# Allegro board 8880F5-0826_newday.brd
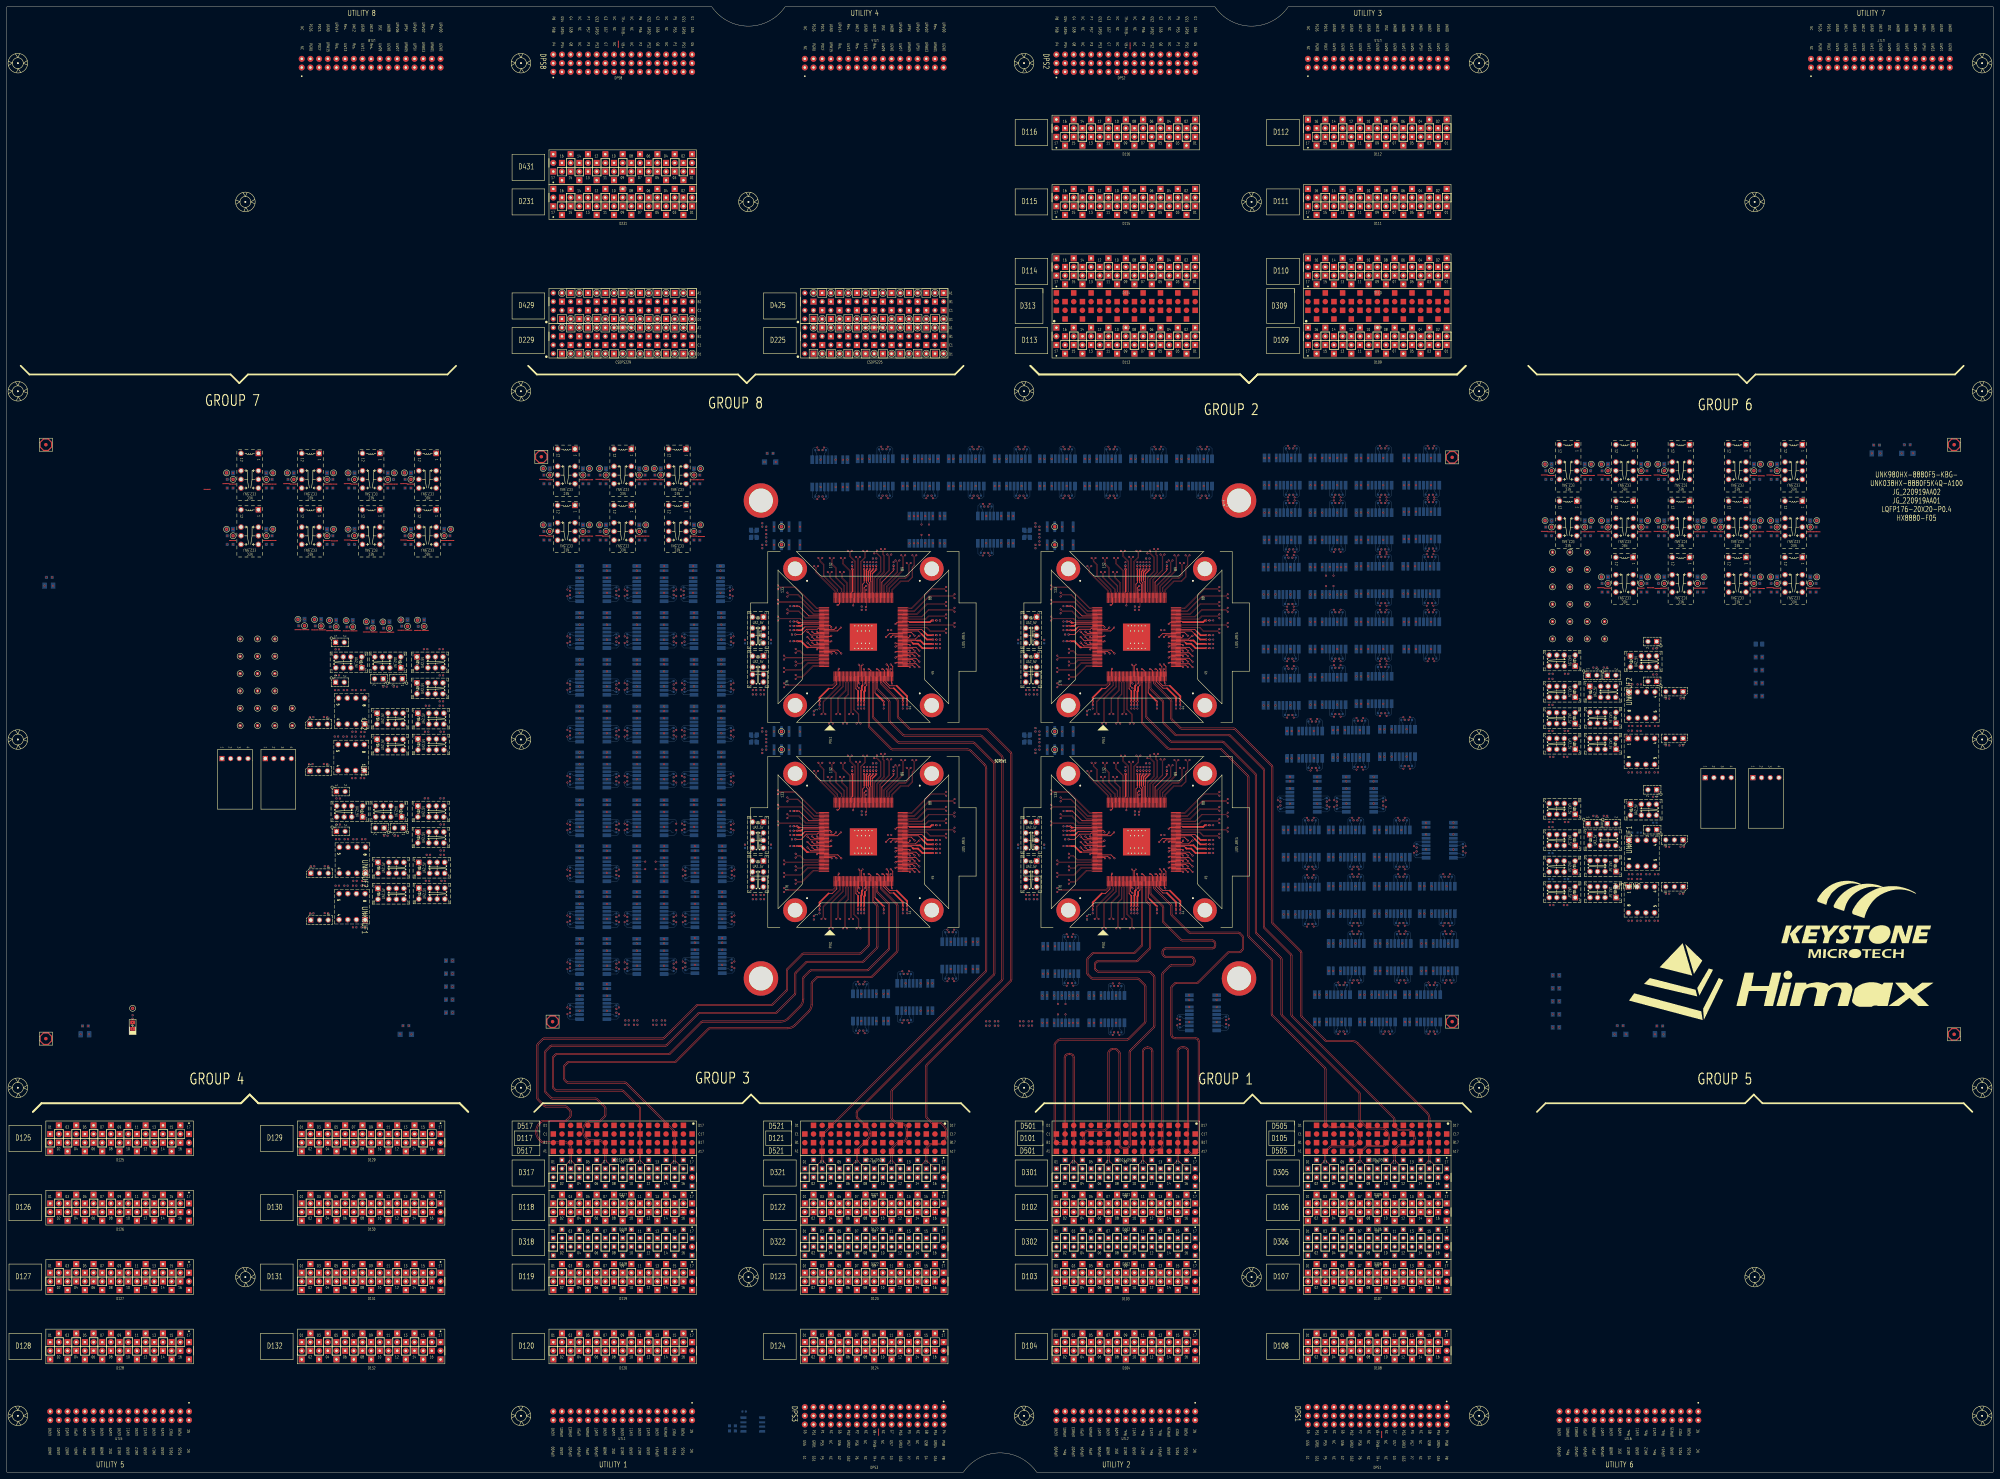
[diagram p0: board, top side]
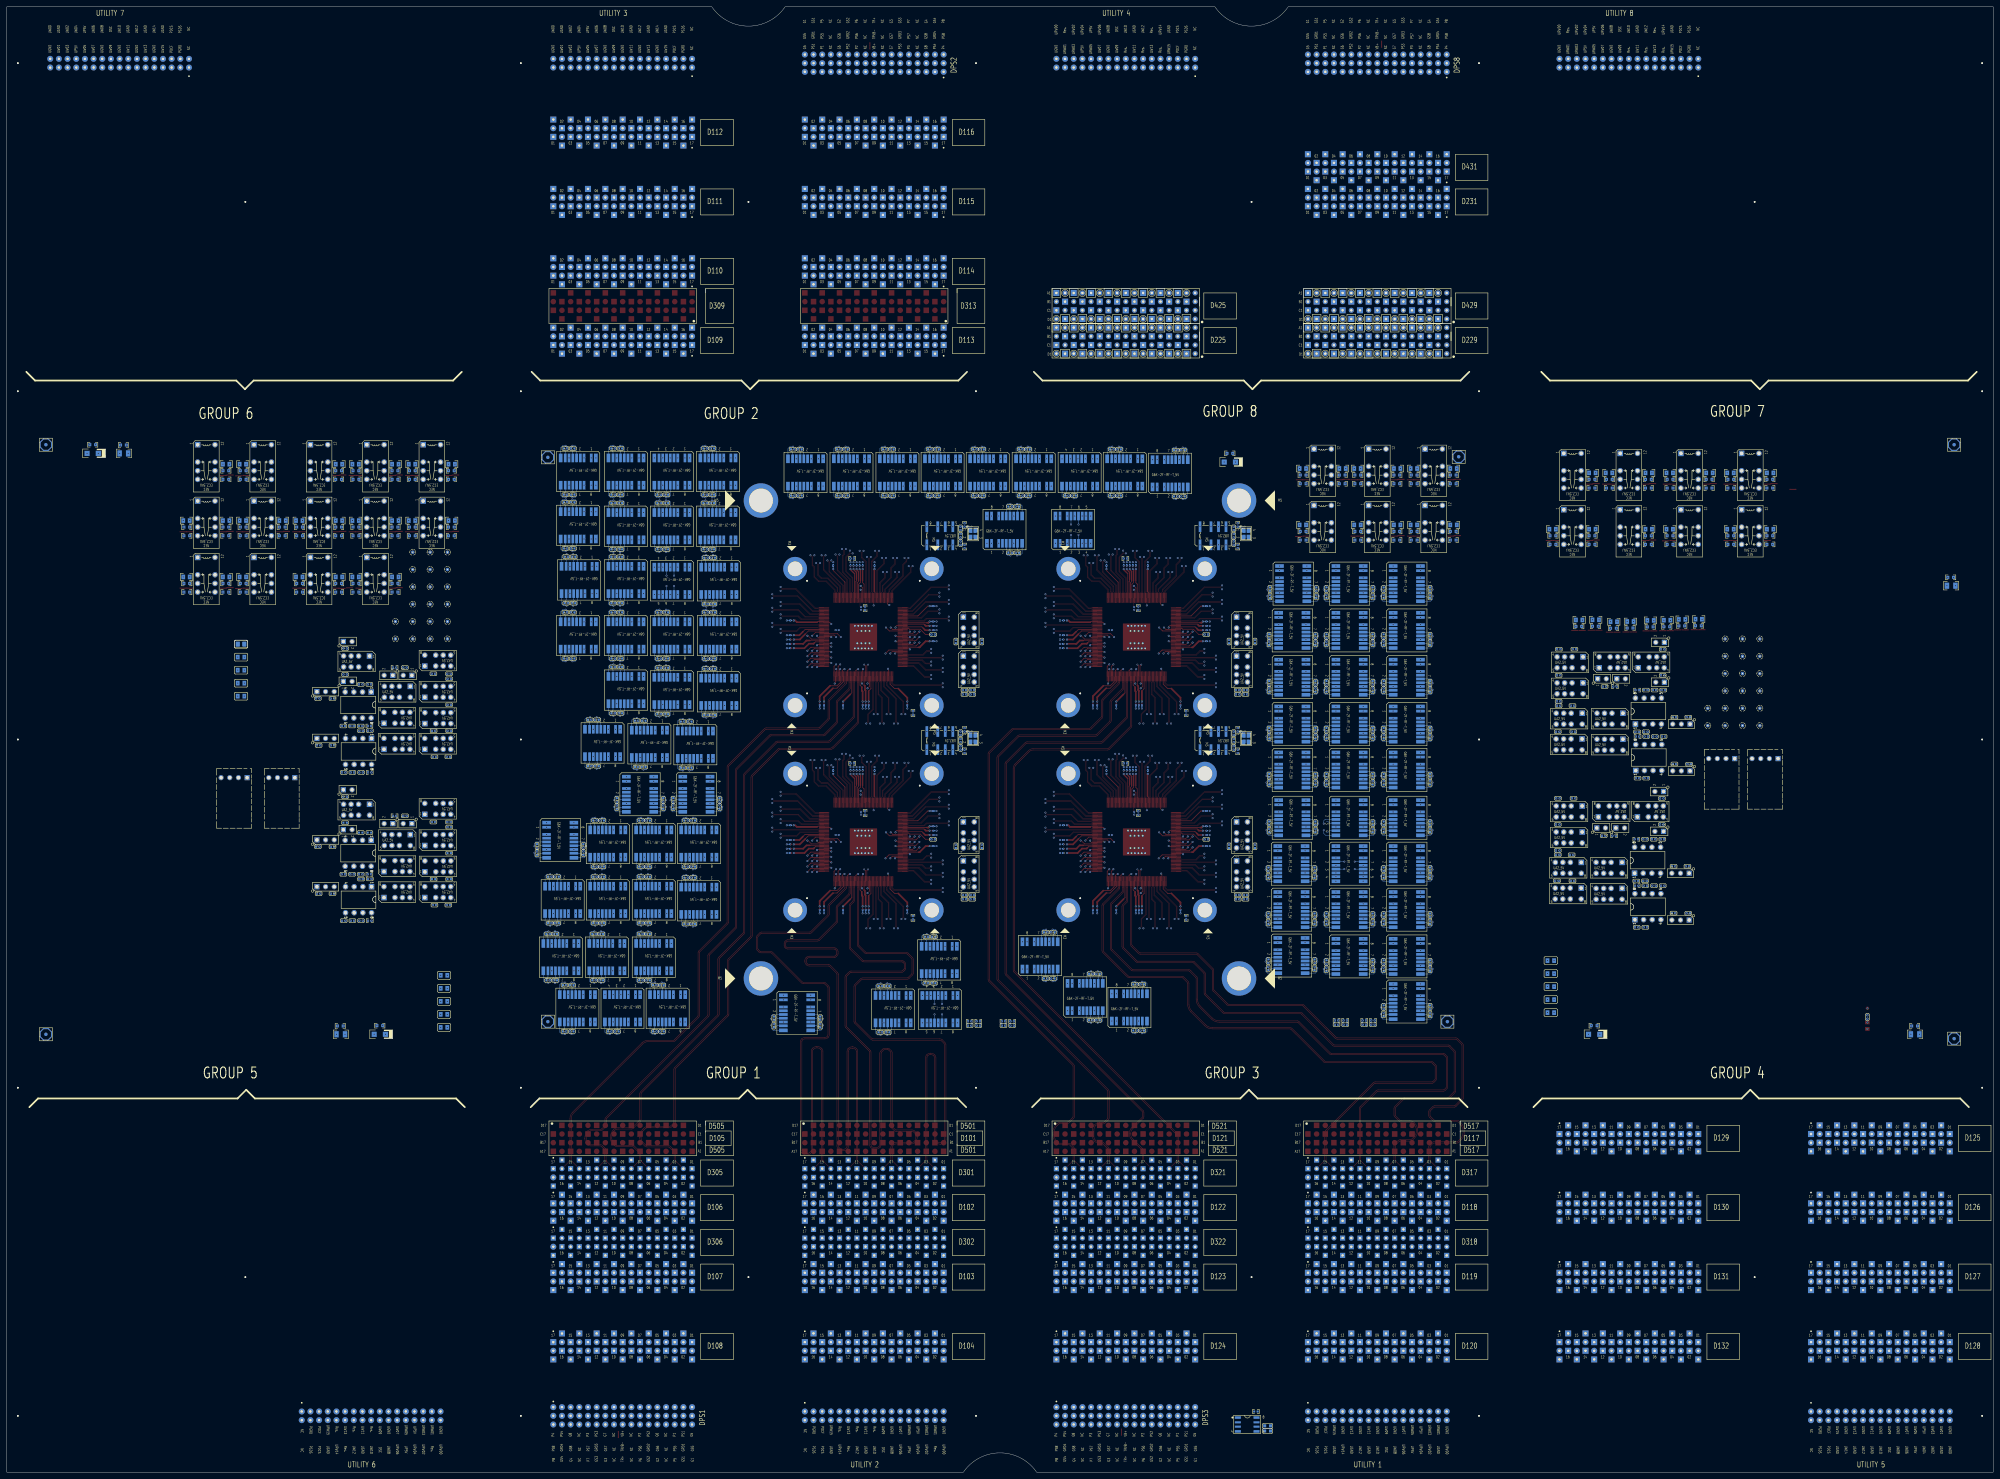
[diagram p1: board, bottom side, seen from below]

Outline 581.66 x 429.26 mm; copper layers: TOP, L02_DGND, L03_SIGNAL, L04_DGND, L05_SIGNAL, L06_DGND, L07_SIGNAL, L08_DGND, L09_SIGNAL, L10_DGND, L11_POWER, L12_DGND, L13_POWER, L14_DGND, L15_POWER, L16_DGND, L17_5V, L18_CBIT, L19_DGND, L20_POWER, L21_DGND, L22_POWER, L23_DGND, L24_POWER, L25_DGND, L26_SIGNAL, L27_DGND, L28_SIGNAL, L29_DGND, L30_SIGNAL, L31_DGND, L32_SIGNAL, L33_DGND, BOTTOM. Coordinates in mm from the lower left corner of the outline.

## Design rules (mm)
net group DIFFPAIR0: nets S1_2TX_100DCH007+ S1_2TX_100DCH007-
net group DIFFPAIR1: nets S1_2TX_100DCH006+ S1_2TX_100DCH006-
net group DIFFPAIR2: nets S1_2TX_100DCH005+ S1_2TX_100DCH005-
net group DIFFPAIR3: nets S1_2TX_100DCH004+ S1_2TX_100DCH004-
net group DIFFPAIR4: nets S1_2TX_100DCH003+ S1_2TX_100DCH003-
net group DIFFPAIR5: nets S1_2TX_100DCH002+ S1_2TX_100DCH002-
net group DIFFPAIR6: nets S1_2TX_100DCH001+ S1_2TX_100DCH001-
net group DIFFPAIR7: nets S3_4TX_100DCH003+ S3_4TX_100DCH003-
net group DIFFPAIR8: nets S3_4TX_100DCH004+ S3_4TX_100DCH004-
net group DIFFPAIR9: nets S3_4TX_100DCH005+ S3_4TX_100DCH005-
net group DIFFPAIR10: nets S3_4TX_100DCH006+ S3_4TX_100DCH006-
net group DIFFPAIR11: nets S3_4TX_100DCH007+ S3_4TX_100DCH007-
net group DIFFPAIR28: nets S3_1TX_100DCH007+ S3_1TX_100DCH007-
net group DIFFPAIR29: nets S3_1TX_100DCH006+ S3_1TX_100DCH006-
net group DIFFPAIR30: nets S3_1TX_100DCH005+ S3_1TX_100DCH005-
net group DIFFPAIR31: nets S3_1TX_100DCH004+ S3_1TX_100DCH004-
net group DIFFPAIR32: nets S3_1TX_100DCH003+ S3_1TX_100DCH003-
net group DIFFPAIR33: nets S3_1TX_100DCH002+ S3_1TX_100DCH002-
net group DIFFPAIR34: nets S3_ISP00+ S3_ISP00-
net group DIFFPAIR35: nets S3_2TX_100DCH001+ S3_2TX_100DCH001-
net group DIFFPAIR36: nets S3_2TX_100DCH002+ S3_2TX_100DCH002-
net group DIFFPAIR37: nets S3_2TX_100DCH003+ S3_2TX_100DCH003-
net group DIFFPAIR38: nets S3_2TX_100DCH004+ S3_2TX_100DCH004-
net group DIFFPAIR39: nets S3_2TX_100DCH005+ S3_2TX_100DCH005-
net group DIFFPAIR40: nets S3_2TX_100DCH006+ S3_2TX_100DCH006-
net group DIFFPAIR41: nets S3_2TX_100DCH007+ S3_2TX_100DCH007-
net group DIFFPAIR42: nets S3_ISP14+ S3_ISP14-
net group DIFFPAIR43: nets S3_3TX_100DCH002+ S3_3TX_100DCH002-
net group DIFFPAIR44: nets S3_3TX_100DCH003+ S3_3TX_100DCH003-
net group DIFFPAIR45: nets S3_3TX_100DCH004+ S3_3TX_100DCH004-
net group DIFFPAIR46: nets S3_3TX_100DCH005+ S3_3TX_100DCH005-
net group DIFFPAIR47: nets S3_3TX_100DCH006+ S3_3TX_100DCH006-
net group DIFFPAIR48: nets S3_3TX_100DCH007+ S3_3TX_100DCH007-
net group DIFFPAIR49: nets S3_4TX_100DCH001+ S3_4TX_100DCH001-
net group DIFFPAIR50: nets S3_4TX_100DCH002+ S3_4TX_100DCH002-
net group DIFFPAIR51: nets S1_4TX_100DCH003+ S1_4TX_100DCH003-
net group DIFFPAIR52: nets S1_4TX_100DCH004+ S1_4TX_100DCH004-
net group DIFFPAIR53: nets S1_4TX_100DCH005+ S1_4TX_100DCH005-
net group DIFFPAIR54: nets S1_4TX_100DCH006+ S1_4TX_100DCH006-
net group DIFFPAIR55: nets S1_4TX_100DCH007+ S1_4TX_100DCH007-
net group DIFFPAIR68: nets D32102 D32104
net group DIFFPAIR69: nets D32106 D32108
net group DIFFPAIR70: nets D32110 D32112
net group DIFFPAIR71: nets D32114 D32116
net group DIFFPAIR72: nets S1_1TX_100DCH007+ S1_1TX_100DCH007-
net group DIFFPAIR73: nets S1_1TX_100DCH006+ S1_1TX_100DCH006-
net group DIFFPAIR74: nets S1_1TX_100DCH005+ S1_1TX_100DCH005-
net group DIFFPAIR75: nets S1_1TX_100DCH004+ S1_1TX_100DCH004-
net group DIFFPAIR76: nets S1_1TX_100DCH003+ S1_1TX_100DCH003-
net group DIFFPAIR77: nets S1_1TX_100DCH002+ S1_1TX_100DCH002-
net group DIFFPAIR78: nets S1_ISP00+ S1_ISP00-
net group DIFFPAIR79: nets S1_ISP14+ S1_ISP14-
net group DIFFPAIR80: nets S1_3TX_100DCH002+ S1_3TX_100DCH002-
net group DIFFPAIR81: nets S1_3TX_100DCH003+ S1_3TX_100DCH003-
net group DIFFPAIR82: nets S1_3TX_100DCH004+ S1_3TX_100DCH004-
net group DIFFPAIR83: nets S1_3TX_100DCH005+ S1_3TX_100DCH005-
net group DIFFPAIR84: nets S1_3TX_100DCH006+ S1_3TX_100DCH006-
net group DIFFPAIR85: nets S1_3TX_100DCH007+ S1_3TX_100DCH007-
net group DIFFPAIR86: nets S1_4TX_100DCH001+ S1_4TX_100DCH001-
net group DIFFPAIR87: nets S1_4TX_100DCH002+ S1_4TX_100DCH002-
net group DIFFPAIR88: nets S2_4TX_100DCH003+ S2_4TX_100DCH003-
net group DIFFPAIR89: nets S2_4TX_100DCH004+ S2_4TX_100DCH004-
net group DIFFPAIR90: nets S2_4TX_100DCH005+ S2_4TX_100DCH005-
net group DIFFPAIR91: nets S2_4TX_100DCH006+ S2_4TX_100DCH006-
net group DIFFPAIR92: nets S2_4TX_100DCH007+ S2_4TX_100DCH007-
net group DIFFPAIR105: nets S2_1TX_100DCH007+ S2_1TX_100DCH007-
net group DIFFPAIR106: nets S2_1TX_100DCH006+ S2_1TX_100DCH006-
net group DIFFPAIR107: nets S2_1TX_100DCH005+ S2_1TX_100DCH005-
net group DIFFPAIR108: nets S2_1TX_100DCH004+ S2_1TX_100DCH004-
net group DIFFPAIR109: nets S2_1TX_100DCH003+ S2_1TX_100DCH003-
net group DIFFPAIR110: nets S2_1TX_100DCH002+ S2_1TX_100DCH002-
net group DIFFPAIR111: nets S2_ISP00+ S2_ISP00-
net group DIFFPAIR112: nets S2_2TX_100DCH001+ S2_2TX_100DCH001-
net group DIFFPAIR113: nets S2_2TX_100DCH002+ S2_2TX_100DCH002-
net group DIFFPAIR114: nets S2_2TX_100DCH003+ S2_2TX_100DCH003-
net group DIFFPAIR115: nets S2_2TX_100DCH004+ S2_2TX_100DCH004-
net group DIFFPAIR116: nets S2_2TX_100DCH005+ S2_2TX_100DCH005-
net group DIFFPAIR117: nets S2_2TX_100DCH006+ S2_2TX_100DCH006-
net group DIFFPAIR118: nets S2_2TX_100DCH007+ S2_2TX_100DCH007-
net group DIFFPAIR119: nets S2_ISP14+ S2_ISP14-
net group DIFFPAIR120: nets S2_3TX_100DCH002+ S2_3TX_100DCH002-
net group DIFFPAIR121: nets S2_3TX_100DCH003+ S2_3TX_100DCH003-
net group DIFFPAIR122: nets S2_3TX_100DCH004+ S2_3TX_100DCH004-
net group DIFFPAIR123: nets S2_3TX_100DCH005+ S2_3TX_100DCH005-
net group DIFFPAIR124: nets S2_3TX_100DCH006+ S2_3TX_100DCH006-
net group DIFFPAIR125: nets S2_3TX_100DCH007+ S2_3TX_100DCH007-
net group DIFFPAIR126: nets S2_4TX_100DCH001+ S2_4TX_100DCH001-
net group DIFFPAIR127: nets S2_4TX_100DCH002+ S2_4TX_100DCH002-
net group DIFFPAIR128: nets S4_4TX_100DCH003+ S4_4TX_100DCH004-
net group DIFFPAIR129: nets S4_4TX_100DCH005+ S4_4TX_100DCH005-
net group DIFFPAIR130: nets S4_4TX_100DCH006+ S4_4TX_100DCH006-
net group DIFFPAIR131: nets S4_4TX_100DCH007+ S4_4TX_100DCH007-
net group DIFFPAIR144: nets S4_1TX_100DCH007+ S4_1TX_100DCH007-
net group DIFFPAIR145: nets S4_1TX_100DCH006+ S4_1TX_100DCH006-
net group DIFFPAIR146: nets S4_1TX_100DCH005+ S4_1TX_100DCH005-
net group DIFFPAIR147: nets S4_1TX_100DCH004+ S4_1TX_100DCH004-
net group DIFFPAIR148: nets S4_1TX_100DCH003+ S4_1TX_100DCH003-
net group DIFFPAIR149: nets S4_1TX_100DCH002+ S4_1TX_100DCH002-
net group DIFFPAIR150: nets S4_ISP00+ S4_ISP00-
net group DIFFPAIR151: nets S4_2TX_100DCH001+ S4_2TX_100DCH001-
net group DIFFPAIR152: nets S4_2TX_100DCH002+ S4_2TX_100DCH002-
net group DIFFPAIR153: nets S4_2TX_100DCH003+ S4_2TX_100DCH003-
net group DIFFPAIR154: nets S4_2TX_100DCH004+ S4_2TX_100DCH004-
net group DIFFPAIR155: nets S4_2TX_100DCH005+ S4_2TX_100DCH005-
net group DIFFPAIR156: nets S4_2TX_100DCH006+ S4_2TX_100DCH006-
net group DIFFPAIR157: nets S4_2TX_100DCH007+ S4_2TX_100DCH007-
net group DIFFPAIR158: nets S4_ISP14+ S4_ISP14-
net group DIFFPAIR159: nets S4_3TX_100DCH002+ S4_3TX_100DCH002-
net group DIFFPAIR160: nets S4_3TX_100DCH003+ S4_3TX_100DCH003-
net group DIFFPAIR161: nets S4_3TX_100DCH004+ S4_3TX_100DCH004-
net group DIFFPAIR162: nets S4_3TX_100DCH005+ S4_3TX_100DCH005-
net group DIFFPAIR163: nets S4_3TX_100DCH006+ S4_3TX_100DCH006-
net group DIFFPAIR164: nets S4_3TX_100DCH007+ S4_3TX_100DCH007-
net group DIFFPAIR165: nets S4_4TX_100DCH001+ S4_4TX_100DCH001-
net group DIFFPAIR166: nets S4_4TX_100DCH002+ S4_4TX_100DCH002-
net group DIFFPAIR167: nets D31702 D31704
net group DIFFPAIR168: nets D31706 D31708
net group DIFFPAIR169: nets D31710 D31712
net group DIFFPAIR170: nets D31714 D31716
net group DIFFPAIR171: nets D30102 D30104
net group DIFFPAIR172: nets D30106 D30108
net group DIFFPAIR173: nets D30110 D30112
net group DIFFPAIR174: nets D30114 D30116
net group DIFFPAIR175: nets D30502 D30504
net group DIFFPAIR176: nets D30506 D30508
net group DIFFPAIR177: nets D30510 D30512
net group DIFFPAIR178: nets D30514 D30516
net group DIFFPAIR179: nets D12502 D12504
net group DIFFPAIR180: nets D12506 D12508
net group DIFFPAIR181: nets D12510 D12512
net group DIFFPAIR182: nets D12514 D12516
net group DIFFPAIR183: nets D12501 D12503
net group DIFFPAIR184: nets D12505 D12507
net group DIFFPAIR185: nets D12509 D12511
net group DIFFPAIR186: nets D12513 D12515
net group DIFFPAIR187: nets D12610 D12612
net group DIFFPAIR188: nets D12614 D12616
net group DIFFPAIR189: nets D12609 D12611
net group DIFFPAIR190: nets D12613 D12615
net group DIFFPAIR191: nets D12902 D12904
net group DIFFPAIR192: nets D12906 D12908
net group DIFFPAIR193: nets D12910 D12912
net group DIFFPAIR194: nets D12914 D12916
net group DIFFPAIR195: nets D12901 D12903
net group DIFFPAIR196: nets D12905 D12907
net group DIFFPAIR197: nets D12909 D12911
net group DIFFPAIR198: nets D12913 D12915
net group DIFFPAIR199: nets D13002 D13004
net group DIFFPAIR200: nets D13014 D13016
net group DIFFPAIR201: nets D13001 D13003
net group DIFFPAIR202: nets D13013 D13015
net group DIFFPAIR203: nets D10801 D10803
net group DIFFPAIR204: nets D10805 D10807
net group DIFFPAIR205: nets D10809 D10811
net group DIFFPAIR206: nets D10813 D10815
net group DIFFPAIR207: nets D10802 D10804
net group DIFFPAIR208: nets D10806 D10808
net group DIFFPAIR209: nets D10810 D10812
net group DIFFPAIR210: nets D10814 D10816
net group DIFFPAIR211: nets D10701 D10703
net group DIFFPAIR212: nets D10713 D10715
net group DIFFPAIR213: nets D10702 D10704
net group DIFFPAIR214: nets D10714 D10716
net group DIFFPAIR215: nets D10914 D10916
net group DIFFPAIR216: nets D10910 D10912
net group DIFFPAIR217: nets D10906 D10908
net group DIFFPAIR218: nets D10902 D10904
net group DIFFPAIR219: nets D10901 D10903
net group DIFFPAIR220: nets D10905 D10907
net group DIFFPAIR221: nets D10909 D10911
net group DIFFPAIR222: nets D10913 D10915
net group DIFFPAIR223: nets D11014 D11016
net group DIFFPAIR224: nets D11002 D11004
net group DIFFPAIR225: nets D11001 D11003
net group DIFFPAIR226: nets D11013 D11015

## Placement (name value [footprint] x y rotation side)
BD29  BD120-3A-S8  [FB0805]  129.54 134.62 180 bottom
BD30  BD120-3A-S8  [FB0805]  129.54 146.05 180 bottom
BD31  BD120-3A-S8  [FB0805]  129.54 142.24 0 bottom
BD32  BD120-3A-S8  [FB0805]  513.08 238.76 180 bottom
BD33  BD120-3A-S8  [FB0805]  513.08 242.57 180 bottom
BD34  BD120-3A-S8  [FB0805]  453.64 145.54 0 bottom
BD35  BD120-3A-S8  [FB0805]  453.64 137.92 180 bottom
BD36  BD120-3A-S8  [FB0805]  129.54 138.43 180 bottom
BD37  BD120-3A-S8  [FB0805]  453.64 130.3 180 bottom
BD38  BD120-3A-S8  [FB0805]  513.08 242.57 180 bottom
BD39  BD120-3A-S8  [FB0805]  453.64 141.73 0 bottom
BD40  BD120-3A-S8  [FB0805]  453.64 134.11 180 bottom
BD41  BD120-3A-S8  [FB0805]  513.08 234.95 180 bottom
BD42  BD120-3A-S8  [FB0805]  513.08 231.14 180 bottom
BD43  BD120-3A-S8  [FB0805]  513.08 227.33 180 bottom
BD44  BD120-3A-S8  [FB0805]  129.54 149.86 180 bottom
BR902  330-1-S4  [R0402]  36.83 133.35 270 bottom
C3  0.1U-16-X-S4-MU  [C0402]  184.15 132.33 180 bottom
C4  0.1U-16-X-S4-MU  [C0402]  181.61 132.33 180 bottom
C5  22P-50-N-S4-AVX  [C0402]  221.21 277.48 90 bottom
C6  22P-50-N-S4-AVX  [C0402]  221.21 271.16 270 bottom
C7  0.1U-16-X-S4-MU  [C0402]  110.74 230.12 0 bottom
C8  0.1U-16-X-S4-MU  [C0402]  104.14 215.5 180 bottom
C9  0.1U-16-X-S4-MU  [C0402]  104.24 229.1 180 bottom
CA1  NC/10U-10-X6S-S6-MU  [C0603]  186.05 292.1 0 bottom
CA2  NC/47U-10-X5R-S8-TDK  [C0805]  186.16 294 0 bottom
CA3  NC/10U-10-X6S-S6-MU  [C0603]  174.62 292.1 180 bottom
CA4  NC/47U-10-X5R-S8-TDK  [C0805]  174.52 294 180 bottom
CA5  NC/10U-10-X6S-S6-MU  [C0603]  117.47 290.83 180 bottom
CA6  NC/47U-10-X5R-S8-TDK  [C0805]  117.37 292.74 180 bottom
CA7  NC/10U-10-X6S-S6-MU  [C0603]  169.54 292.1 0 bottom
CA8  NC/47U-10-X5R-S8-TDK  [C0805]  169.65 294 0 bottom
CA9  NC/10U-10-X6S-S6-MU  [C0603]  158.11 292.1 180 bottom
CA10  NC/47U-10-X5R-S8-TDK  [C0805]  158.01 294 180 bottom
CA11  NC/10U-10-X6S-S6-MU  [C0603]  186.05 275.59 0 bottom
CA12  NC/47U-10-X5R-S8-TDK  [C0805]  186.16 277.5 0 bottom
CA13  NC/47U-10-X5R-S8-TDK  [C0805]  202.16 294 0 bottom
CA14  NC/10U-10-X6S-S6-MU  [C0603]  202.06 292.1 0 bottom
CA15  NC/47U-10-X5R-S8-TDK  [C0805]  190.53 294 180 bottom
CA16  NC/10U-10-X6S-S6-MU  [C0603]  190.63 292.1 180 bottom
CA17  NC/47U-10-X5R-S8-TDK  [C0805]  169.65 277.5 0 bottom
CA18  NC/10U-10-X6S-S6-MU  [C0603]  169.54 275.59 0 bottom
CA19  NC/47U-10-X5R-S8-TDK  [C0805]  100.34 249.52 180 bottom
CA20  NC/10U-10-X6S-S6-MU  [C0603]  100.44 247.61 180 bottom
CA21  10U-10-X6S-S6-MU  [C0603]  186.05 289.56 0 bottom
CA22  10U-10-X6S-S6-MU  [C0603]  174.62 289.56 180 bottom
CA23  10U-10-X6S-S6-MU  [C0603]  117.47 288.29 180 bottom
CA24  10U-10-X6S-S6-MU  [C0603]  169.54 289.56 0 bottom
CA25  10U-10-X6S-S6-MU  [C0603]  158.11 289.56 180 bottom
CA26  10U-10-X6S-S6-MU  [C0603]  186.05 273.05 0 bottom
CA27  10U-10-X6S-S6-MU  [C0603]  202.06 289.56 0 bottom
CA28  10U-10-X6S-S6-MU  [C0603]  190.63 289.56 180 bottom
CA29  10U-10-X6S-S6-MU  [C0603]  169.54 273.05 0 bottom
CA30  NC/47U-10-X5R-S8-TDK  [C0805]  95.47 249.57 180 bottom
CA31  10U-10-X6S-S6-MU  [C0603]  95.57 247.66 180 bottom
CA32  NC/10U-10-X6S-S6-MU  [C0603]  202.06 275.59 0 bottom
CA33  NC/47U-10-X5R-S8-TDK  [C0805]  202.16 277.5 0 bottom
CA34  10U-10-X6S-S6-MU  [C0603]  202.06 273.05 0 bottom
CA35  NC/10U-10-X6S-S6-MU  [C0603]  174.62 275.59 180 bottom
CA36  NC/47U-10-X5R-S8-TDK  [C0805]  174.52 277.5 180 bottom
CA37  10U-10-X6S-S6-MU  [C0603]  174.62 273.05 180 bottom
CA38  NC/10U-10-X6S-S6-MU  [C0603]  158.11 275.59 180 bottom
CA39  NC/47U-10-X5R-S8-TDK  [C0805]  158.01 277.5 180 bottom
CA40  10U-10-X6S-S6-MU  [C0603]  158.11 273.05 180 bottom
CB1  0.1U-25-X-S6  [C0603]  116.84 130.81 0 bottom
CB2  10U-16-T-SA  [CODE_A]  116.84 128.27 0 bottom
CB3  0.1U-25-X-S6  [C0603]  472.44 130.81 0 bottom
CB4  10U-16-T-SA  [CODE_A]  472.44 128.27 0 bottom
CB5  0.1U-25-X-S6  [C0603]  556.51 300.99 0 bottom
CB6  10U-16-T-SA  [CODE_A]  556.51 298.45 0 bottom
CB7  0.1U-25-X-S6  [C0603]  223.52 298.45 0 bottom
CB8  10U-16-T-SA  [CODE_A]  223.52 295.91 0 bottom
CB9  0.1U-25-X-S6  [C0603]  23.01 130.71 0 bottom
CB10  10U-25-X7R-SA  [C1206]  22.86 128.27 0 bottom
CB11  0.1U-25-X-S6  [C0603]  484.02 130.71 0 bottom
CB12  10U-25-X7R-SA  [C1206]  483.87 128.27 0 bottom
CB13  0.1U-25-X-S6  [C0603]  547.52 300.89 0 bottom
CB14  10U-25-X7R-SA  [C1206]  547.37 298.45 0 bottom
CB15  0.1U-25-X-S6  [C0603]  12.45 262.13 0 bottom
CB16  10U-25-X7R-SA  [C1206]  12.3 259.69 0 bottom
CB19  0.1U-25-X7R-S4-MU  [C0402]  215.9 17.78 180 bottom
CC1  0.47U-10-X6S-S2-TY  [C0201]  237.98 224.12 90 bottom
CC2  4.7U-10-X6T-S4-MU  [C0402]  236.32 222.4 270 bottom
CC4  0.47U-10-X6S-S2-TY  [C0201]  229.81 247.93 0 bottom
CC6  0.47U-10-X6S-S2-TY  [C0201]  250.17 224.12 90 bottom
CC7  0.47U-10-X6S-S2-TY  [C0201]  229.81 246.66 0 bottom
CC8  0.47U-10-X6S-S2-TY  [C0201]  263.63 224.12 90 bottom
CC9  0.47U-10-X6S-S2-TY  [C0201]  254.61 266.16 270 bottom
CC11  0.47U-10-X6S-S2-TY  [C0201]  251.06 224.12 90 bottom
CC13  0.47U-10-X6S-S2-TY  [C0201]  256.77 224.12 90 bottom
CC15  4.7U-2.5-X6S-S2-MU  [C0201]  259.65 264.95 90 bottom
CC16  NC/4.7U-2.5-X6S-S2-MU  [C0201]  271.64 249.5 0 bottom
CC17  4.7U-2.5-X6S-S2-MU  [C0201]  229.81 253.69 0 bottom
CC19  0.47U-10-X6S-S2-TY  [C0201]  252.83 266.16 270 bottom
CC20  4.7U-10-X6T-S4-MU  [C0402]  254.11 267.66 0 bottom
CC22  0.47U-10-X6S-S2-TY  [C0201]  251.05 266.16 270 bottom
CC23  4.7U-10-X6T-S4-MU  [C0402]  250.34 253.09 270 bottom
CC25  0.47U-10-X6S-S2-TY  [C0201]  272.85 245.18 180 bottom
CC26  0.47U-10-X6S-S2-TY  [C0201]  253.72 266.16 270 bottom
CC27  0.47U-10-X6S-S2-TY  [C0201]  272.85 249.5 180 bottom
CC28  0.47U-10-X6S-S2-TY  [C0201]  259.65 266.16 270 bottom
CC29  0.47U-10-X6S-S2-TY  [C0201]  231.03 253.69 180 bottom
CC30  0.47U-10-X6S-S2-TY  [C0201]  229.81 243.41 0 bottom
CC31  0.47U-10-X6S-S2-TY  [C0201]  249.28 224.12 90 bottom
CC32  0.47U-10-X6S-S2-TY  [C0201]  262.36 224.12 90 bottom
CC33  0.47U-10-X6S-S2-TY  [C0201]  272.85 243.91 180 bottom
CC34  0.47U-10-X6S-S2-TY  [C0201]  251.94 266.16 270 bottom
CC35  0.47U-10-X6S-S2-TY  [C0201]  272.85 241.37 180 bottom
CC36  0.47U-10-X6S-S2-TY  [C0201]  272.85 242.64 180 bottom
CC37  0.47U-10-X6S-S2-TY  [C0201]  247.57 264.95 90 bottom
CC38  NC/4.7U-2.5-X6S-S2-MU  [C0201]  247.57 266.16 270 bottom
CC39  0.47U-10-X6S-S2-TY  [C0201]  231.03 249.2 180 bottom
CC40  4.7U-2.5-X6S-S2-MU  [C0201]  258.5 246.67 180 bottom
CC41  4.7U-2.5-X6S-S2-MU  [C0201]  229.81 249.2 0 bottom
CC42  4.7U-2.5-X6S-S2-MU  [C0201]  251.54 253.03 90 bottom
CD1  0.1U-10-X7R-S2-MU  [C0201]  237.98 225.34 270 top
CD3  0.1U-10-X7R-S2-MU  [C0201]  271.64 241.37 0 top
CD4  0.1U-10-X7R-S2-MU  [C0201]  254.61 264.95 90 top
CD5  0.1U-10-X7R-S2-MU  [C0201]  263.63 225.34 270 top
CD6  0.1U-10-X7R-S2-MU  [C0201]  231.03 246.66 180 top
CD7  0.1U-10-X7R-S2-MU  [C0201]  271.64 242.64 0 top
CD8  0.1U-10-X7R-S2-MU  [C0201]  251.06 225.34 270 top
CD9  0.1U-10-X7R-S2-MU  [C0201]  256.77 225.34 270 top
CD10  0.1U-10-X7R-S2-MU  [C0201]  271.64 249.5 0 top
CD11  0.1U-10-X7R-S2-MU  [C0201]  259.65 264.95 90 top
CD12  0.1U-10-X7R-S2-MU  [C0201]  231.03 253.69 180 top
CD13  0.1U-10-X7R-S2-MU  [C0201]  252.83 264.95 90 top
CD14  0.1U-10-X7R-S2-MU  [C0201]  251.05 264.95 90 top
CD15  0.1U-10-X7R-S2-MU  [C0201]  271.64 245.18 0 top
CD16  0.1U-10-X7R-S2-MU  [C0201]  253.72 264.95 90 top
CD17  0.1U-10-X7R-S2-MU  [C0201]  231.03 247.93 180 top
CD18  0.1U-10-X7R-S2-MU  [C0201]  251.94 264.95 90 top
CD19  0.1U-10-X7R-S2-MU  [C0201]  231.03 243.41 180 top
CD20  0.1U-10-X7R-S2-MU  [C0201]  271.64 243.91 0 top
CD21  0.1U-10-X7R-S2-MU  [C0201]  262.36 225.34 270 top
CD22  0.1U-10-X7R-S2-MU  [C0201]  249.28 225.34 270 top
CD23  0.1U-10-X7R-S2-MU  [C0201]  250.17 225.34 270 top
CD24  0.1U-10-X7R-S2-MU  [C0201]  247.57 264.95 90 top
CD25  0.1U-10-X7R-S2-MU  [C0201]  231.03 249.2 180 top
CSDPS225  V93K_CSDPS_DPS32  [PG_VG93K_PF_DPS32_G8D225]  254 331.47 0 top
CSDPS229  V93K_CSDPS_DPS32  [PG_VG93K_PF_DPS32_G8D229]  180.34 331.47 0 top
CSDPS425  V93K_CSDPS_DPS32  [PG_VG93K_PF_DPS32_G8D425]  254 341.63 0 top
CSDPS429  V93K_CSDPS_DPS32  [PG_VG93K_PF_DPS32_G8D429]  180.34 341.63 0 top
D101/D501  V93K_PS1600 HD  [PG_VG93K_F_HSM_G1D101_501_ND]  327.66 97.79 0 top
D102  V93K_CH  [PG_VG93K_F_G1D102]  327.66 77.47 0 top
D103  V93K_CH  [PG_VG93K_F_G1D103]  327.66 57.15 0 top
D104  V93K_CH  [PG_VG93K_F_G1D104]  327.66 36.83 0 top
D105/D505  V93K_PS1600 HD  [PG_VG93K_F_HSM_G1D105_505_ND]  401.32 97.79 0 top
D106  V93K_CH  [PG_VG93K_F_G1D106]  401.32 77.47 0 top
D107  V93K_CH  [PG_VG93K_F_G1D107]  401.32 57.15 0 top
D108  V93K_CH  [PG_VG93K_F_G1D108]  401.32 36.83 0 top
D109  V93K_CH  [PG_VG93K_F_G2D109]  401.32 331.47 0 top
D110  V93K_CH  [PG_VG93K_F_G2D110]  401.32 351.79 0 top
D111  V93K_CH  [PG_VG93K_F_G2D111]  401.32 372.11 0 top
D112  V93K_CH  [PG_VG93K_F_G2D112]  401.32 392.43 0 top
D113  V93K_CH  [PG_VG93K_F_G2D113]  327.66 331.47 0 top
D114  V93K_CH  [PG_VG93K_F_G2D114]  327.66 351.79 0 top
D115  V93K_CH  [PG_VG93K_F_G2D115]  327.66 372.11 0 top
D116  V93K_CH  [PG_VG93K_F_G2D116]  327.66 392.43 0 top
D117/D517  V93K_PS1600 HD  [PG_VG93K_F_HSM_G3D117_517_ND]  180.34 97.79 0 top
D118  V93K_CH  [PG_VG93K_F_G3D118]  180.34 77.47 0 top
D119  V93K_CH  [PG_VG93K_F_G3D119]  180.34 57.15 0 top
D120  V93K_CH  [PG_VG93K_F_G3D120]  180.34 36.83 0 top
D121/D521  V93K_PS1600 HD  [PG_VG93K_F_HSM_G3D121_521_ND]  254 97.79 0 top
D122  V93K_CH  [PG_VG93K_F_G3D122]  254 77.47 0 top
D123  V93K_CH  [PG_VG93K_F_G3D123]  254 57.15 0 top
D124  V93K_CH  [PG_VG93K_F_G3D124]  254 36.83 0 top
D125  V93K_CH  [PG_VG93K_F_G4D125]  33.02 97.79 0 top
D126  V93K_CH  [PG_VG93K_F_G4D126]  33.02 77.47 0 top
D127  V93K_CH  [PG_VG93K_F_G4D127]  33.02 57.15 0 top
D128  V93K_CH  [PG_VG93K_F_G4D128]  33.02 36.83 0 top
D129  V93K_CH  [PG_VG93K_F_G4D129]  106.68 97.79 0 top
D130  V93K_CH  [PG_VG93K_F_G4D130]  106.68 77.47 0 top
D131  V93K_CH  [PG_VG93K_F_G4D131]  106.68 57.15 0 top
D132  V93K_CH  [PG_VG93K_F_G4D132]  106.68 36.83 0 top
D231  V93K_CH  [PG_VG93K_F_G8D231]  180.34 372.11 0 top
D301  V93K_CH  [PG_VG93K_F_G1D301]  327.66 87.63 0 top
D302  V93K_CH  [PG_VG93K_F_G1D302]  327.66 67.31 0 top
D305  V93K_CH  [PG_VG93K_F_G1D305]  401.32 87.63 0 top
D306  V93K_CH  [PG_VG93K_F_G1D306]  401.32 67.31 0 top
D309  V93K_PSSL  [PG_VG93K_F_PSSL_G2D309_ND]  401.32 341.63 0 top
D313  V93K_PSSL  [PG_VG93K_F_PSSL_G2D313_ND]  327.66 341.63 0 top
D317  V93K_CH  [PG_VG93K_F_G3D317]  180.34 87.63 0 top
D318  V93K_CH  [PG_VG93K_F_G3D318]  180.34 67.31 0 top
D321  V93K_CH  [PG_VG93K_F_G3D321]  254 87.63 0 top
D322  V93K_CH  [PG_VG93K_F_G3D322]  254 67.31 0 top
D431  V93K_CH  [PG_VG93K_F_G8D431]  180.34 382.27 0 top
DPS1  V93K_DPS  [PG_VG93K_F_G1DPS1]  401.32 16.51 0 top
DPS2  V93K_DPS  [PG_VG93K_F_G2DPS2]  327.66 412.75 0 top
DPS3  V93K_DPS  [PG_VG93K_F_G3DPS3]  254 16.51 0 top
DPS8  V93K_DPS  [PG_VG93K_F_G8DPS8]  180.34 412.75 0 top
FD1  -  [FD_040_V2]  159.82 131.98 0 top
FD2  -  [FD_040_V2]  423.24 131.98 0 top
FD3  -  [FD_040_V2]  423.24 297.28 0 top
FD4  -  [FD_040_V2]  156.51 297.46 0 top
FD5  -  [FD_040_V2]  159.82 131.98 180 bottom
FD6  -  [FD_040_V2]  423.24 131.98 180 bottom
FD7  -  [FD_040_V2]  423.24 297.28 180 bottom
FD8  -  [FD_040_V2]  156.51 297.46 180 bottom
FD9  -  [FD_040_V2]  570.23 128.27 180 bottom
FD10  -  [FD_040_V2]  570.23 300.99 0 top
FD11  -  [FD_040_V2]  570.23 300.99 180 bottom
FD12  -  [FD_040_V2]  11.43 300.99 0 top
FD13  -  [FD_040_V2]  11.43 300.99 180 bottom
FD14  -  [FD_040_V2]  11.43 127 0 top
FD15  -  [FD_040_V2]  11.43 127 180 bottom
FD16  -  [FD_040_V2]  570.23 128.27 0 top
GND1  TP01  [TP_040_T]  173.57 294 0 top
GND2  TP01  [TP_040_T]  187.11 294 180 top
GND3  TP01  [TP_040_T]  116.42 292.74 0 top
GND4  TP01  [TP_040_T]  157.06 294 0 top
GND5  TP01  [TP_040_T]  170.6 294 180 top
GND6  TP01  [TP_040_T]  173.57 277.5 0 top
GND7  TP01  [TP_040_T]  203.11 294 180 top
GND8  TP01  [TP_040_T]  189.58 294 0 top
GND9  TP01  [TP_040_T]  170.6 277.5 180 top
GND10  TP01  [TP_040_T]  99.36 249.46 0 top
GND11  TP01  [TP_040_T]  94.49 249.52 0 top
GND12  TP01  [TP_040_T]  203.11 277.5 180 top
GND13  TP01  [TP_040_T]  187.11 277.5 180 top
GND14  TP01  [TP_040_T]  157.06 277.5 0 top
HX8880-F05  REF-CODE-CHIP  [CHIP_CODE]  559.05 279.65 0 top
J1  HDR-2X1-M  [JP_2P_100]  110.24 232.41 270 bottom
J2  HDR-3X1-M  [JP_3P_100]  88.76 205.43 90 bottom
J3  HDR-3X1-M  [JP_3P_100]  88.76 219.15 90 bottom
J4  HDR-2X1-M  [JP_2P_100]  96.27 231.39 90 bottom
J5  HDR-2X1-M  [JP_2P_100]  96.27 243.08 90 bottom
JG_220919AA01  REF-CODE-SOCKET  [SOCKET_CODE]  559.05 284.73 0 top
JG_220919AA02  REF-CODE-SOCKET  [SOCKET_CODE]  559.05 287.27 0 top
K1  G6K-2F-RF-T-5V-SPECIAL  [RL_G6K2FRT_8P_5V_GR]  171.7 219.2 270 bottom
K2  G6K-2F-RF-T-5V-SPECIAL  [RL_G6K2FRT_8P_5V_GR]  205.23 232.92 270 bottom
K3  G6K-2F-RF-T-5V-SPECIAL  [RL_G6K2FRT_8P_5V_GR]  294.39 292.86 0 bottom
K4  G6K-2F-RF-T-5V-SPECIAL  [RL_G6K2FRT_8P_5V_GR]  307.59 292.86 0 bottom
K5  G6K-2F-RF-T-5V-SPECIAL  [RL_G6K2FRT_8P_5V_GR]  347.73 292.86 0 bottom
K6  G6K-2F-RF-T-5V-SPECIAL  [RL_G6K2FRT_8P_5V_GR]  334.26 292.86 0 bottom
K7  G6K-2F-RF-T-5V-SPECIAL  [RL_G6K2FRT_8P_5V_GR]  320.8 292.86 0 bottom
K8  G6K-2F-RF-T-5V-SPECIAL  [RL_G6K2FRT_8P_5V_GR]  267.46 292.86 0 bottom
K9  UA2-5NJ-A-V3  [RL_NECUA2_5V_V3]  219.96 235.46 90 bottom
K10  UA2-5NJ-A-V3  [RL_NECUA2_5V_V3]  111.76 237.24 0 bottom
K11  G6K-2F-RF-T-5V-SPECIAL  [RL_G6K2FRT_8P_5V_GR]  289.56 276.1 180 bottom
K12  UA2-5NJ-A-V3  [RL_NECUA2_5V_V3]  219.96 246.89 90 bottom
K13  UA2-5NJ-A-V3  [RL_NECUA2_5V_V3]  123.7 229.62 180 bottom
K14  UA2-5NJ-A-V3  [RL_NECUA2_5V_V3]  112.01 220.73 180 bottom
K15  UA2-5NJ-A-V3  [RL_NECUA2_5V_V3]  123.99 213.19 180 bottom
K16  G6K-2F-RF-T-5V-SPECIAL  [RL_G6K2FRT_8P_5V_GR]  241.05 292.61 180 bottom
K17  G6K-2F-RF-T-5V-SPECIAL  [RL_G6K2FRT_8P_5V_GR]  254.25 292.86 0 bottom
K18  UB2-5NU-B  [RL_NECUB2_5V]  228.45 274.32 0 bottom
K19  UA2-5NJ-A-V3  [RL_NECUA2_5V_V3]  112.01 213.11 180 bottom
K20  UA2-5NJ-A-V3  [RL_NECUA2_5V_V3]  123.95 220.73 180 bottom
K21  G6K-2F-RF-T-5V-SPECIAL  [RL_G6K2FRT_8P_5V_GR]  280.92 292.86 0 bottom
K22  G6K-2F-RF-T-5V-SPECIAL  [RL_G6K2FRT_8P_5V_GR]  205.23 246.63 270 bottom
K23  G6K-2F-RF-T-5V-SPECIAL  [RL_G6K2FRT_8P_5V_GR]  188.47 232.92 270 bottom
K24  G6K-2F-RF-T-5V-SPECIAL  [RL_G6K2FRT_8P_5V_GR]  171.7 232.92 270 bottom
K25  G6K-2F-RF-T-5V-SPECIAL  [RL_G6K2FRT_8P_5V_GR]  204.98 260.35 270 bottom
K26  G6K-2F-RF-T-5V-SPECIAL  [RL_G6K2FRT_8P_5V_GR]  188.47 246.63 270 bottom
K27  G6K-2F-RF-T-5V-SPECIAL  [RL_G6K2FRT_8P_5V_GR]  171.7 246.63 270 bottom
K28  UA2-5NJ-A-V3  [RL_NECUA2_5V_V3]  100.33 237.24 0 bottom
K29  G6K-2F-RF-T-5V-SPECIAL  [RL_G6K2FRT_8P_5V_GR]  171.7 260.35 270 bottom
K30  G6K-2F-RF-T-5V-SPECIAL  [RL_G6K2FRT_8P_5V_GR]  188.47 260.35 270 bottom
K31  EC2-5NJ-A  [RL_NECEC2_10P_5V]  196.34 276.86 90 bottom
K33  NC/UA2-5NJ-A-V3  [RL_NECUA2_5V_V3]  123.7 237.24 180 bottom
K34  EC2-5NJ-A  [RL_NECEC2_10P_5V]  180.34 293.37 90 bottom
K36  EC2-5NJ-A  [RL_NECEC2_10P_5V]  123.19 292.1 90 bottom
K37  EC2-5NJ-A  [RL_NECEC2_10P_5V]  163.83 293.37 90 bottom
K39  EC2-5NJ-A  [RL_NECEC2_10P_5V]  180.34 276.86 90 bottom
K40  EC2-5NJ-A  [RL_NECEC2_10P_5V]  196.34 293.37 90 bottom
K42  EC2-5NJ-A  [RL_NECEC2_10P_5V]  163.83 276.86 90 bottom
K43  G6K-2F-RF-T-5V-SPECIAL  [RL_G6K2FRT_8P_5V_GR]  269.49 276.1 180 bottom
LD902  LDG-2-S8  [LED_0805]  36.83 130.81 90 top
LOGO1  -  [LOGO_KT_KSMT]  538.48 154.94 0 top
LOGO2  LOGO_HX_Himax  [LOGO_HX_HIMAX]  518.16 138.43 0 top
LQFP176-20X20-P0.4  REF-CODE-CHIP  [CHIP_CODE]  559.05 282.19 0 top
NOREF  -  []  405.5 289.12 90 top
NOREF#2  -  []  451.64 179.06 0 top
NOREF#3  -  []  253.4 265.56 0 top
NOREF#4  -  []  409.17 281.37 0 top
NOREF#5  -  []  108.01 195.15 0 top
NOREF#6  -  []  328.96 224.72 0 top
NOREF#7  -  []  166.06 216.47 90 top
NOREF#8  -  []  463.11 186.77 0 top
NOREF#9  -  []  257.09 164.74 90 top
NOREF#10  -  []  201.66 199.99 90 top
NOREF#11  -  []  408.88 133.16 90 top
NOREF#12  -  []  266.49 143.19 0 top
NOREF#13  -  []  411.26 209.66 90 top
NOREF#14  -  []  451.64 222.5 0 top
NOREF#15  -  []  375.73 199.18 90 top
NOREF#16  -  []  210.86 187.32 90 top
NOREF#17  -  []  107.02 166.42 90 top
NOREF#18  -  []  412.79 209.16 90 top
NOREF#19  -  []  226.27 156.63 90 top
NOREF#20  -  []  459.24 219.3 90 top
NOREF#21  -  []  272.24 243.59 90 top
NOREF#22  -  []  218.13 274.06 0 top
NOREF#23  -  []  332.51 265.56 90 top
NOREF#24  -  []  352.24 184.86 90 top
NOREF#25  -  []  402.14 146.88 0 top
NOREF#26  -  []  167.7 233.47 90 top
NOREF#27  -  []  221.56 242.89 0 top
NOREF#28  -  []  352.25 241.69 0 top
NOREF#29  -  []  239.33 243.63 90 top
NOREF#30  -  []  210.6 255.9 90 top
NOREF#31  -  []  319.33 236.03 90 top
NOREF#32  -  []  346.27 135.17 90 top
NOREF#33  -  []  451.64 179.06 0 top
NOREF#34  -  []  184.47 255.15 90 top
NOREF#35  -  []  401.87 139.89 0 top
NOREF#36  -  []  309.51 187.93 0 top
NOREF#37  -  []  473.6 162.62 90 top
NOREF#38  -  []  272.25 245.5 0 top
NOREF#39  -  []  459.28 168.33 90 top
NOREF#40  -  []  304.82 146.05 0 top
NOREF#41  -  []  118.7 195.7 0 top
NOREF#42  -  []  329.28 223.82 90 top
NOREF#43  -  []  252.83 264.65 90 top
NOREF#44  -  []  264.29 272.1 90 top
NOREF#45  -  []  108.01 195.15 0 top
NOREF#46  -  []  408.02 287.22 0 top
NOREF#47  -  []  294.94 296.86 0 top
NOREF#48  -  []  413.96 182.44 90 top
NOREF#49  -  []  230.73 249.2 0 top
NOREF#50  -  []  107.02 171.57 0 top
NOREF#51  -  []  380.53 217.11 0 top
NOREF#52  -  []  272.25 183.59 90 top
NOREF#53  -  []  419.47 289.12 90 top
NOREF#54  -  []  412.88 131.89 0 top
NOREF#55  -  []  201.23 186.57 0 top
NOREF#56  -  []  450.03 210.36 0 top
NOREF#57  -  []  284.77 288.86 0 top
NOREF#58  -  []  383.09 224.85 0 top
NOREF#59  -  []  262.68 223.52 90 top
NOREF#60  -  []  412.24 144.98 90 top
NOREF#61  -  []  404.4 273.16 90 top
NOREF#62  -  []  392.47 256.66 90 top
NOREF#63  -  []  318.45 197.01 0 top
NOREF#64  -  []  338.11 288.86 0 top
NOREF#65  -  []  351.04 249.82 0 top
NOREF#66  -  []  463.61 222.58 0 top
NOREF#67  -  []  266.74 272.1 0 top
NOREF#68  -  []  254.29 204.35 90 top
NOREF#69  -  []  194.09 146.68 90 top
NOREF#70  -  []  339.65 265.86 90 top
NOREF#71  -  []  182.57 212.85 0 top
NOREF#72  -  []  124.35 222.33 0 top
NOREF#73  -  []  184.47 233.47 90 top
NOREF#74  -  []  199.33 240.28 90 top
NOREF#75  -  []  397.8 163.19 90 top
NOREF#76  -  []  118.33 271.33 90 top
NOREF#77  -  []  339.33 264.35 90 top
NOREF#78  -  []  168.13 159.1 90 top
NOREF#79  -  []  397.55 209.41 90 top
NOREF#80  -  []  166.06 203.01 90 top
NOREF#81  -  []  210.86 242.18 90 top
NOREF#82  -  []  272.24 183.59 90 top
NOREF#83  -  []  305.94 296.86 0 top
NOREF#84  -  []  201.23 215.35 90 top
NOREF#85  -  []  167.7 165.4 90 top
NOREF#86  -  []  120.21 178.64 0 top
NOREF#87  -  []  398.65 289.12 0 top
NOREF#88  -  []  337.9 186.35 90 top
NOREF#89  -  []  449.99 217.9 0 top
NOREF#90  -  []  339.33 205.56 0 top
NOREF#91  -  []  331.38 163.52 90 top
NOREF#92  -  []  185.2 273.5 90 top
NOREF#93  -  []  392.21 131.94 90 top
NOREF#94  -  []  118.96 179.19 0 top
NOREF#95  -  []  336.77 165.04 90 top
NOREF#96  -  []  375.73 193.43 90 top
NOREF#97  -  []  230.43 187.61 0 top
NOREF#98  -  []  388.43 163.64 0 top
NOREF#99  -  []  182.82 216.47 90 top
NOREF#100  -  []  250.17 165.04 90 top
NOREF#101  -  []  306.83 269.63 90 top
NOREF#102  -  []  230.43 183.09 90 top
NOREF#103  -  []  412.79 209.06 90 top
NOREF#104  -  []  325.92 131.64 0 top
NOREF#105  -  []  389.7 209.36 0 top
NOREF#106  -  []  386.33 207.21 90 top
NOREF#107  -  []  329.6 224.74 90 top
NOREF#108  -  []  381.2 258.38 90 top
NOREF#109  -  []  388.43 146.88 0 top
NOREF#110  -  []  331.54 252.73 90 top
NOREF#111  -  []  251.38 164.74 90 top
NOREF#112  -  []  165.8 171.96 0 top
NOREF#113  -  []  384.59 162.94 90 top
NOREF#114  -  []  200.98 258.7 90 top
NOREF#115  -  []  184.47 178.86 90 top
NOREF#116  -  []  127.7 231.22 0 top
NOREF#117  -  []  342.04 164.74 0 top
NOREF#118  -  []  253.4 265.56 90 top
NOREF#119  -  []  184.89 145.38 90 top
NOREF#120  -  []  352.25 185.5 0 top
NOREF#121  -  []  184.47 173.11 0 top
NOREF#122  -  []  273.09 288.31 90 top
NOREF#123  -  []  387.08 154.88 0 top
NOREF#124  -  []  35.83 132.61 0 top
NOREF#125  -  []  409.49 180.15 0 top
NOREF#126  -  []  192.47 150.58 90 top
NOREF#127  -  []  309.51 193.69 0 top
NOREF#128  -  []  175.7 168.6 90 top
NOREF#129  -  []  330.49 164.74 90 top
NOREF#130  -  []  367.48 258.38 90 top
NOREF#131  -  []  237.66 224.74 0 top
NOREF#132  -  []  405.5 225.11 90 top
NOREF#133  -  []  230.43 188.88 90 top
NOREF#134  -  []  475.04 239.09 0 top
NOREF#135  -  []  252.51 205.55 0 top
NOREF#136  -  []  403.41 209.61 0 top
NOREF#137  -  []  334.29 265.56 0 top
NOREF#138  -  []  398.65 241.11 0 top
NOREF#139  -  []  230.43 189.52 0 top
NOREF#140  -  []  184.47 161 90 top
NOREF#141  -  []  271.04 185.5 0 top
NOREF#142  -  []  167.7 173.11 90 top
NOREF#143  -  []  112.05 246.78 90 top
NOREF#144  -  []  182.82 148.4 90 top
NOREF#145  -  []  199.08 254 90 top
NOREF#146  -  []  230.43 243.09 90 top
NOREF#147  -  []  250.73 205.56 0 top
NOREF#148  -  []  328.96 224.74 0 top
NOREF#149  -  []  199.59 230.19 90 top
NOREF#150  -  []  404.4 225.16 90 top
NOREF#151  -  []  303.84 288.86 0 top
NOREF#152  -  []  410.78 131.89 0 top
NOREF#153  -  []  209.23 191.22 90 top
NOREF#154  -  []  453.88 239.34 0 top
NOREF#155  -  []  400.24 202.38 90 top
NOREF#156  -  []  403.99 180.15 0 top
NOREF#157  -  []  240.94 211.63 90 top
NOREF#158  -  []  241.6 296.61 0 top
NOREF#159  -  []  261.63 195.43 90 top
NOREF#160  -  []  471.21 211.76 90 top
NOREF#161  -  []  339.89 288.41 90 top
NOREF#162  -  []  238.3 224.74 90 top
NOREF#163  -  []  395.07 129.99 0 top
NOREF#164  -  []  122.19 247.3 90 top
NOREF#165  -  []  272.24 184.86 90 top
NOREF#166  -  []  210.86 228.47 90 top
NOREF#167  -  []  119.7 238.84 0 top
NOREF#168  -  []  343.95 223.52 90 top
NOREF#169  -  []  271.34 189.5 0 top
NOREF#170  -  []  418.12 257.42 90 top
NOREF#171  -  []  253.4 205.55 0 top
NOREF#172  -  []  184.47 227.72 0 top
NOREF#173  -  []  368.03 249.11 0 top
NOREF#174  -  []  373.93 297.12 0 top
NOREF#175  -  []  378.33 224.6 90 top
NOREF#176  -  []  401.89 163.64 0 top
NOREF#177  -  []  168.69 276.04 90 top
NOREF#178  -  []  385.93 144.98 0 top
NOREF#179  -  []  168.13 145.38 90 top
NOREF#180  -  []  318.32 131.64 0 top
NOREF#181  -  []  254.29 265.56 0 top
NOREF#182  -  []  263.31 224.72 0 top
NOREF#183  -  []  253.72 205.86 90 top
NOREF#184  -  []  192.47 191.22 90 top
NOREF#185  -  []  330.17 225.04 90 top
NOREF#186  -  []  230.73 247.93 0 top
NOREF#187  -  []  124.35 187.53 0 top
NOREF#188  -  []  277.17 288.86 0 top
NOREF#189  -  []  394.66 258.64 90 top
NOREF#190  -  []  397.8 146.33 90 top
NOREF#191  -  []  167.7 206.29 90 top
NOREF#192  -  []  175.7 264.1 90 top
NOREF#193  -  []  109.96 238.84 0 top
NOREF#194  -  []  272.8 145.48 90 top
NOREF#195  -  []  247.57 204.65 90 top
NOREF#196  -  []  127.55 184.33 90 top
NOREF#197  -  []  352.55 183.91 0 top
NOREF#198  -  []  209.59 160.9 90 top
NOREF#199  -  []  382.47 133.16 90 top
NOREF#200  -  []  373.32 164.66 90 top
NOREF#201  -  []  175.7 243.88 90 top
NOREF#202  -  []  251.62 264.35 90 top
NOREF#203  -  []  367.73 290.39 90 top
NOREF#204  -  []  201.49 173.11 90 top
NOREF#205  -  []  261.63 173.83 90 top
NOREF#206  -  []  388.43 163.64 0 top
NOREF#207  -  []  317.66 224.74 0 top
NOREF#208  -  []  167.7 200.54 0 top
NOREF#209  -  []  217.41 213.24 90 top
NOREF#210  -  []  298.16 177.06 0 top
NOREF#211  -  []  259.33 204.35 90 top
NOREF#212  -  []  237.2 296.61 0 top
NOREF#213  -  []  448.94 292.92 90 top
NOREF#214  -  []  456.08 186.77 0 top
NOREF#215  -  []  310.41 248.88 90 top
NOREF#216  -  []  380.59 239.21 0 top
NOREF#217  -  []  192.57 228.97 90 top
NOREF#218  -  []  309.21 247.61 0 top
NOREF#219  -  []  259.33 265.56 0 top
NOREF#220  -  []  237.57 209.63 90 top
NOREF#221  -  []  555.66 300.54 90 top
NOREF#222  -  []  201.23 204.09 90 top
NOREF#223  -  []  257.09 223.52 90 top
NOREF#224  -  []  310.43 186.34 90 top
NOREF#225  -  []  339.65 264.65 90 top
NOREF#226  -  []  201.91 159.1 90 top
NOREF#227  -  []  308.36 262.16 45 top
NOREF#228  -  []  399.39 161.74 0 top
NOREF#229  -  []  209.23 195.52 90 top
NOREF#230  -  []  258.2 246.67 0 top
NOREF#231  -  []  471.21 168.33 90 top
NOREF#232  -  []  301.34 286.96 0 top
NOREF#233  -  []  272.8 157.28 0 top
NOREF#234  -  []  339.65 264.65 90 top
NOREF#235  -  []  263.83 231.63 90 top
NOREF#236  -  []  248.96 224.72 0 top
NOREF#237  -  []  392.47 288.67 90 top
NOREF#238  -  []  314.2 145.6 90 top
NOREF#239  -  []  398.53 144.98 90 top
NOREF#240  -  []  310.43 194.01 0 top
NOREF#241  -  []  395.2 233.11 0 top
NOREF#242  -  []  423.61 188.92 90 top
NOREF#243  -  []  337.9 246.35 90 top
NOREF#244  -  []  119.95 187.53 0 top
NOREF#245  -  []  310.41 188.88 90 top
NOREF#246  -  []  127.95 222.33 0 top
NOREF#247  -  []  409.17 249.11 0 top
NOREF#248  -  []  384.36 131.89 0 top
NOREF#249  -  []  175.7 135.17 90 top
NOREF#250  -  []  238.3 223.52 90 top
NOREF#251  -  []  404.4 241.16 90 top
NOREF#252  -  []  127.81 175.44 90 top
NOREF#253  -  []  310.73 243.41 0 top
NOREF#254  -  []  223.56 245.29 90 top
NOREF#255  -  []  199.59 216.47 90 top
NOREF#256  -  []  218.16 188.49 0 top
NOREF#257  -  []  274.67 286.96 0 top
NOREF#258  -  []  297.83 174.63 90 top
NOREF#259  -  []  272.55 182.64 0 top
NOREF#260  -  []  404.15 273.11 0 top
NOREF#261  -  []  354.08 286.96 90 top
NOREF#262  -  []  352.25 181.69 0 top
NOREF#263  -  []  528.1 276.41 90 top
NOREF#264  -  []  201.23 219.75 90 top
NOREF#265  -  []  313.98 131.09 90 top
NOREF#266  -  []  251.94 265.86 90 top
NOREF#267  -  []  116.27 178.64 0 top
NOREF#268  -  []  449.99 174.46 0 top
NOREF#269  -  []  330.49 224.74 90 top
NOREF#270  -  []  184.47 178.86 90 top
NOREF#271  -  []  331.05 264.65 90 top
NOREF#272  -  []  310.43 247.61 0 top
NOREF#273  -  []  230.43 186.34 0 top
NOREF#274  -  []  388.43 146.88 0 top
NOREF#275  -  []  511.59 276.41 90 top
NOREF#276  -  []  381.74 281.11 0 top
NOREF#277  -  []  352.25 182.96 0 top
NOREF#278  -  []  333.4 265.56 90 top
NOREF#279  -  []  305.94 288.86 0 top
NOREF#280  -  []  418.37 273.42 90 top
NOREF#281  -  []  216.96 240.71 0 top
NOREF#282  -  []  175.7 195.52 90 top
NOREF#283  -  []  330.51 288.86 0 top
NOREF#284  -  []  199.59 145.03 0 top
NOREF#285  -  []  272.25 243.59 90 top
NOREF#286  -  []  392.47 288.57 90 top
NOREF#287  -  []  418.63 131.94 90 top
NOREF#288  -  []  184.47 260.9 90 top
NOREF#289  -  []  331.94 265.86 90 top
NOREF#290  -  []  473.79 196.21 0 top
NOREF#291  -  []  167.7 159.65 90 top
NOREF#292  -  []  396.55 257.37 0 top
NOREF#293  -  []  230.73 253.69 0 top
NOREF#294  -  []  334.29 205.55 0 top
NOREF#295  -  []  250.49 223.52 90 top
NOREF#296  -  []  249.13 140.14 0 top
NOREF#297  -  []  310.41 243.09 90 top
NOREF#298  -  []  247.25 265.56 0 top
NOREF#299  -  []  297.41 213.24 0 top
NOREF#300  -  []  194.09 228.47 90 top
NOREF#301  -  []  409.74 146.88 0 top
NOREF#302  -  []  394.05 223.21 0 top
NOREF#303  -  []  392.66 192.88 90 top
NOREF#304  -  []  495.08 274.77 90 top
NOREF#305  -  []  415.1 163.64 0 top
NOREF#306  -  []  340.83 234.63 90 top
NOREF#307  -  []  302.11 240.71 0 top
NOREF#308  -  []  301.56 182.89 0 top
NOREF#309  -  []  127.55 219.13 90 top
NOREF#310  -  []  115.87 175.44 90 top
NOREF#311  -  []  460.93 234.74 90 top
NOREF#312  -  []  310.43 246.34 0 top
NOREF#313  -  []  167.7 187.92 90 top
NOREF#314  -  []  271.04 249.82 0 top
NOREF#315  -  []  383.09 224.85 0 top
NOREF#316  -  []  271.34 243.91 0 top
NOREF#317  -  []  219.76 297.18 0 top
NOREF#318  -  []  302.11 180.71 0 top
NOREF#319  -  []  408.63 274.64 90 top
NOREF#320  -  []  412.62 273.37 0 top
NOREF#321  -  []  392.04 241.11 90 top
NOREF#322  -  []  175.7 209.49 90 top
NOREF#323  -  []  373.83 192.28 90 top
NOREF#324  -  []  259.33 264.35 90 top
NOREF#325  -  []  237.83 197.63 0 top
NOREF#326  -  []  461.86 230.75 0 top
NOREF#327  -  []  96.58 195.15 0 top
NOREF#328  -  []  259.33 205.55 0 top
NOREF#329  -  []  400.24 195.88 90 top
NOREF#330  -  []  465.81 222.58 0 top
NOREF#331  -  []  182.82 243.9 90 top
NOREF#332  -  []  409.74 180.2 90 top
NOREF#333  -  []  309.05 211.67 0 top
NOREF#334  -  []  394.66 242.38 90 top
NOREF#335  -  []  304.61 131.64 0 top
NOREF#336  -  []  199.59 145.03 90 top
NOREF#337  -  []  254.29 265.55 0 top
NOREF#338  -  []  423.61 184.62 90 top
NOREF#339  -  []  368.03 232.6 0 top
NOREF#340  -  []  184.47 256.5 90 top
NOREF#341  -  []  410.52 289.12 0 top
NOREF#342  -  []  415.61 179.97 90 top
NOREF#343  -  []  118.33 289.48 90 top
NOREF#344  -  []  332.61 288.86 0 top
NOREF#345  -  []  226.83 209.63 90 top
NOREF#346  -  []  391.96 131.89 0 top
NOREF#347  -  []  201.23 217.55 90 top
NOREF#348  -  []  297.71 216.09 0 top
NOREF#349  -  []  330.74 164.74 0 top
NOREF#350  -  []  337.9 186.99 0 top
NOREF#351  -  []  392.47 272.56 90 top
NOREF#352  -  []  367.48 242.38 90 top
NOREF#353  -  []  106.76 210.11 90 top
NOREF#354  -  []  352.55 249.5 0 top
NOREF#355  -  []  373.68 249.11 0 top
NOREF#356  -  []  414.57 265.37 0 top
NOREF#357  -  []  250.5 288.86 0 top
NOREF#358  -  []  201.49 151.93 90 top
NOREF#359  -  []  234.7 286.71 90 top
NOREF#360  -  []  411.26 163.09 90 top
NOREF#361  -  []  253.72 264.65 90 top
NOREF#362  -  []  310.73 246.66 0 top
NOREF#363  -  []  390.53 146.88 0 top
NOREF#364  -  []  177.33 201.29 90 top
NOREF#365  -  []  402.14 146.88 0 top
NOREF#366  -  []  272.24 189.18 90 top
NOREF#367  -  []  167.7 138.47 90 top
NOREF#368  -  []  331.05 205.86 90 top
NOREF#369  -  []  241.6 296.61 0 top
NOREF#370  -  []  310.41 253.37 90 top
NOREF#371  -  []  450.03 210.36 0 top
NOREF#372  -  []  199.33 257.62 90 top
NOREF#373  -  []  329.16 296.86 0 top
NOREF#374  -  []  184.47 255.15 0 top
NOREF#375  -  []  184.47 241.43 90 top
NOREF#376  -  []  333.33 241.33 90 top
NOREF#377  -  []  272.55 185.18 0 top
NOREF#378  -  []  392.04 289.12 90 top
NOREF#379  -  []  270.04 280.1 0 top
NOREF#380  -  []  277.17 288.86 0 top
NOREF#381  -  []  327.25 265.55 0 top
NOREF#382  -  []  273.59 272.15 90 top
NOREF#383  -  []  167.7 260.9 90 top
NOREF#384  -  []  230.73 187.93 0 top
NOREF#385  -  []  263.71 288.86 0 top
NOREF#386  -  []  229.51 183.41 0 top
NOREF#387  -  []  275.28 290.13 90 top
NOREF#388  -  []  328.96 164.72 0 top
NOREF#389  -  []  251.62 265.56 0 top
NOREF#390  -  []  200.98 260.9 90 top
NOREF#391  -  []  271.04 249.18 0 top
NOREF#392  -  []  230.43 248.88 0 top
NOREF#393  -  []  167.7 192.32 90 top
NOREF#394  -  []  352.55 243.91 0 top
NOREF#395  -  []  448.94 290.38 90 top
NOREF#396  -  []  302.49 296.86 0 top
NOREF#397  -  []  182.57 240.28 0 top
NOREF#398  -  []  286.81 272.1 0 top
NOREF#399  -  []  119.7 231.22 0 top
NOREF#400  -  []  481.96 276.41 90 top
NOREF#401  -  []  331.06 163.82 90 top
NOREF#402  -  []  327.57 264.65 90 top
NOREF#403  -  []  229.21 253.37 0 top
NOREF#404  -  []  241.82 167.13 90 top
NOREF#405  -  []  272.25 185.5 0 top
NOREF#406  -  []  460.93 182.17 90 top
NOREF#407  -  []  184.47 201.89 90 top
NOREF#408  -  []  379.48 239.21 90 top
NOREF#409  -  []  339.33 205.55 0 top
NOREF#410  -  []  451.68 171.53 0 top
NOREF#411  -  []  118.7 190.55 90 top
NOREF#412  -  []  352.25 244.23 0 top
NOREF#413  -  []  329.6 223.52 90 top
NOREF#414  -  []  192.47 195.52 90 top
NOREF#415  -  []  377.32 163.39 0 top
NOREF#416  -  []  331.54 192.73 90 top
NOREF#417  -  []  511.59 273.87 90 top
NOREF#418  -  []  390.94 224.9 90 top
NOREF#419  -  []  262.09 143.19 0 top
NOREF#420  -  []  252.51 265.56 90 top
NOREF#421  -  []  230.73 253.69 0 top
NOREF#422  -  []  249.85 164.74 0 top
NOREF#423  -  []  450.03 225.6 0 top
NOREF#424  -  []  118.7 217.73 90 top
NOREF#425  -  []  122.15 195.15 0 top
NOREF#426  -  []  199.59 243.9 90 top
NOREF#427  -  []  465.81 171.53 0 top
NOREF#428  -  []  303.84 288.86 0 top
NOREF#429  -  []  279.7 155.38 0 top
NOREF#430  -  []  397.3 209.36 0 top
NOREF#431  -  []  453.84 222.5 0 top
NOREF#432  -  []  118.7 182.93 90 top
NOREF#433  -  []  257.9 246.99 0 top
NOREF#434  -  []  410.27 257.37 0 top
NOREF#435  -  []  459.24 175.86 90 top
NOREF#436  -  []  184.47 200.54 90 top
NOREF#437  -  []  122.15 187.53 0 top
NOREF#438  -  []  373.87 188.15 0 top
NOREF#439  -  []  124.64 171.1 0 top
NOREF#440  -  []  258.35 288.91 90 top
NOREF#441  -  []  167.7 204.09 90 top
NOREF#442  -  []  401.89 180.15 0 top
NOREF#443  -  []  230.43 247.61 90 top
NOREF#444  -  []  215.96 237.06 0 top
NOREF#445  -  []  229.21 183.09 0 top
NOREF#446  -  []  192.47 222.95 90 top
NOREF#447  -  []  369.38 257.11 0 top
NOREF#448  -  []  182.57 199.39 90 top
NOREF#449  -  []  201.49 147.53 90 top
NOREF#450  -  []  353.35 288.31 90 top
NOREF#451  -  []  259.65 205.86 90 top
NOREF#452  -  []  334.29 205.56 0 top
NOREF#453  -  []  250.74 164.72 0 top
NOREF#454  -  []  177.33 228.47 90 top
NOREF#455  -  []  337.09 223.52 90 top
NOREF#456  -  []  378.75 256.66 90 top
NOREF#457  -  []  369.38 241.11 0 top
NOREF#458  -  []  175.8 174.36 90 top
NOREF#459  -  []  351.34 249.5 0 top
NOREF#460  -  []  398.65 209.36 90 top
NOREF#461  -  []  104.18 191.95 90 top
NOREF#462  -  []  339.97 264.35 90 top
NOREF#463  -  []  383.83 209.11 0 top
NOREF#464  -  []  252.83 204.65 90 top
NOREF#465  -  []  351.34 181.37 0 top
NOREF#466  -  []  251.94 204.65 90 top
NOREF#467  -  []  201.23 242.78 90 top
NOREF#468  -  []  351.04 242.96 0 top
NOREF#469  -  []  254.29 205.56 0 top
NOREF#470  -  []  420.62 287.22 90 top
NOREF#471  -  []  184.89 213.45 90 top
NOREF#472  -  []  333.72 265.86 90 top
NOREF#473  -  []  106.18 160.58 90 top
NOREF#474  -  []  127.95 195.15 0 top
NOREF#475  -  []  410.84 163.64 90 top
NOREF#476  -  []  122.19 214.79 0 top
NOREF#477  -  []  250.49 164.74 90 top
NOREF#478  -  []  351.34 183.91 0 top
NOREF#479  -  []  375.73 193.43 0 top
NOREF#480  -  []  339.89 288.31 90 top
NOREF#481  -  []  313.77 146.05 90 top
NOREF#482  -  []  295.19 271.65 90 top
NOREF#483  -  []  305.83 264.31 0 top
NOREF#484  -  []  122.44 171.1 0 top
NOREF#485  -  []  320.42 139.64 0 top
NOREF#486  -  []  167.7 161 90 top
NOREF#487  -  []  392.47 224.4 90 top
NOREF#488  -  []  201.23 192.32 90 top
NOREF#489  -  []  175.7 191.22 90 top
NOREF#490  -  []  398.65 249.11 0 top
NOREF#491  -  []  385.18 209.11 90 top
NOREF#492  -  []  473.79 239.64 0 top
NOREF#493  -  []  175.7 154.88 90 top
NOREF#494  -  []  471.59 130.36 90 top
NOREF#495  -  []  330.17 223.82 90 top
NOREF#496  -  []  244.8 288.61 0 top
NOREF#497  -  []  250.74 164.74 0 top
NOREF#498  -  []  400.85 297.12 0 top
NOREF#499  -  []  302.11 252.14 0 top
NOREF#500  -  []  175.7 164.3 90 top
NOREF#501  -  []  127.99 214.79 0 top
NOREF#502  -  []  247.25 265.55 0 top
NOREF#503  -  []  343.98 288.86 0 top
NOREF#504  -  []  220.36 248.49 0 top
NOREF#505  -  []  406.65 223.21 90 top
NOREF#506  -  []  201.23 186.57 90 top
NOREF#507  -  []  453.88 186.77 0 top
NOREF#508  -  []  478.57 293.82 90 top
NOREF#509  -  []  268.01 296.86 0 top
NOREF#510  -  []  390.53 188.15 0 top
NOREF#511  -  []  366.88 222.7 0 top
NOREF#512  -  []  240.5 288.61 0 top
NOREF#513  -  []  317.05 288.86 0 top
NOREF#514  -  []  473.79 239.64 0 top
NOREF#515  -  []  390.34 192.28 0 top
NOREF#516  -  []  334.61 265.86 90 top
NOREF#517  -  []  209.23 236.67 90 top
NOREF#518  -  []  352.24 243.59 90 top
NOREF#519  -  []  188.08 289.11 90 top
NOREF#520  -  []  352.25 242.32 90 top
NOREF#521  -  []  192.47 182.06 90 top
NOREF#522  -  []  229.51 189.2 0 top
NOREF#523  -  []  217.41 273.24 0 top
NOREF#524  -  []  264.29 280.1 0 top
NOREF#525  -  []  346.69 128.87 90 top
NOREF#526  -  []  351.34 241.37 0 top
NOREF#527  -  []  471.11 186.77 0 top
NOREF#528  -  []  456.08 239.34 0 top
NOREF#529  -  []  22.16 130.26 90 top
NOREF#530  -  []  230.43 193.37 90 top
NOREF#531  -  []  271.04 241.69 0 top
NOREF#532  -  []  332.51 265.56 0 top
NOREF#533  -  []  221.56 179.06 0 top
NOREF#534  -  []  167.7 217.55 90 top
NOREF#535  -  []  250.18 242.88 0 top
NOREF#536  -  []  192.57 256.4 90 top
NOREF#537  -  []  283.25 147.43 90 top
NOREF#538  -  []  108.27 178.64 0 top
NOREF#539  -  []  177.33 146.68 90 top
NOREF#540  -  []  381.74 232.85 0 top
NOREF#541  -  []  259.33 265.55 0 top
NOREF#542  -  []  379.01 272.66 90 top
NOREF#543  -  []  412.62 241.11 0 top
NOREF#544  -  []  320.42 131.64 0 top
NOREF#545  -  []  327.25 265.56 90 top
NOREF#546  -  []  252.51 264.35 90 top
NOREF#547  -  []  221.56 239.06 0 top
NOREF#548  -  []  103.93 235.64 90 top
NOREF#549  -  []  459.28 236.14 90 top
NOREF#550  -  []  253.4 205.56 90 top
NOREF#551  -  []  385.32 178.25 90 top
NOREF#552  -  []  177.33 160.4 90 top
NOREF#553  -  []  331.05 204.65 90 top
NOREF#554  -  []  374.88 217.11 0 top
NOREF#555  -  []  165.8 131.57 90 top
NOREF#556  -  []  192.47 177.76 90 top
NOREF#557  -  []  315.82 129.74 0 top
NOREF#558  -  []  317.66 224.72 0 top
NOREF#559  -  []  83.77 247.51 90 top
NOREF#560  -  []  184.47 190.12 90 top
NOREF#561  -  []  341.63 173.83 90 top
NOREF#562  -  []  118.45 234.24 90 top
NOREF#563  -  []  230.83 164.63 0 top
NOREF#564  -  []  393.74 131.44 90 top
NOREF#565  -  []  330.51 288.86 0 top
NOREF#566  -  []  352.25 183.59 90 top
NOREF#567  -  []  250.49 163.52 90 top
NOREF#568  -  []  296.81 275.94 0 top
NOREF#569  -  []  320.83 254.63 0 top
NOREF#570  -  []  326 288.86 90 top
NOREF#571  -  []  419.22 257.37 90 top
NOREF#572  -  []  209.33 215.25 90 top
NOREF#573  -  []  184.47 206.29 90 top
NOREF#574  -  []  302.71 132.91 90 top
NOREF#575  -  []  265.39 135.19 0 top
NOREF#576  -  []  201.23 241.43 90 top
NOREF#577  -  []  334.29 265.55 0 top
NOREF#578  -  []  224.65 211.67 0 top
NOREF#579  -  []  327.25 205.55 0 top
NOREF#580  -  []  246.67 288.16 90 top
NOREF#581  -  []  405.93 272.56 90 top
NOREF#582  -  []  260.74 135.19 90 top
NOREF#583  -  []  285.71 280.1 0 top
NOREF#584  -  []  425.23 180.72 90 top
NOREF#585  -  []  221.56 190.49 0 top
NOREF#586  -  []  320.94 151.63 90 top
NOREF#587  -  []  303.47 154.05 0 top
NOREF#588  -  []  110.47 178.64 0 top
NOREF#589  -  []  388.43 146.88 0 top
NOREF#590  -  []  298.13 214.06 0 top
NOREF#591  -  []  473.7 219.66 90 top
NOREF#592  -  []  155.57 275.14 90 top
NOREF#593  -  []  310.73 253.69 0 top
NOREF#594  -  []  392.47 256.56 90 top
NOREF#595  -  []  405.5 257.37 90 top
NOREF#596  -  []  172.08 275.14 90 top
NOREF#597  -  []  184.47 174.46 90 top
NOREF#598  -  []  175.7 137.37 90 top
NOREF#599  -  []  254.8 296.86 0 top
NOREF#600  -  []  304.65 211.67 0 top
NOREF#601  -  []  412.37 265.37 0 top
NOREF#602  -  []  413.75 171.64 0 top
NOREF#603  -  []  351.83 288.91 90 top
NOREF#604  -  []  201.49 178.86 90 top
NOREF#605  -  []  271.34 249.5 0 top
NOREF#606  -  []  483.04 195.66 0 top
NOREF#607  -  []  300.36 177.06 0 top
NOREF#608  -  []  385.19 281.11 0 top
NOREF#609  -  []  220.36 177.06 0 top
NOREF#610  -  []  290.11 280.1 0 top
NOREF#611  -  []  107.02 179.19 0 top
NOREF#612  -  []  369.38 257.11 0 top
NOREF#613  -  []  371.73 297.12 0 top
NOREF#614  -  []  231.15 219.63 90 top
NOREF#615  -  []  251.38 224.74 90 top
NOREF#616  -  []  396.28 163.69 90 top
NOREF#617  -  []  375.22 180.15 0 top
NOREF#618  -  []  373.93 281.11 0 top
NOREF#619  -  []  254.29 205.56 90 top
NOREF#620  -  []  185.2 276.04 90 top
NOREF#621  -  []  392.24 194.78 90 top
NOREF#622  -  []  272.55 245.18 0 top
NOREF#623  -  []  184.47 151.68 90 top
NOREF#624  -  []  397.57 131.89 0 top
NOREF#625  -  []  201.49 146.18 0 top
NOREF#626  -  []  388.43 180.15 0 top
NOREF#627  -  []  450.03 166.93 0 top
NOREF#628  -  []  410.78 131.89 0 top
NOREF#629  -  []  377.23 241.16 90 top
NOREF#630  -  []  344.62 131.89 90 top
NOREF#631  -  []  248.96 164.72 0 top
NOREF#632  -  []  528.1 273.87 90 top
NOREF#633  -  []  182.57 185.42 0 top
NOREF#634  -  []  210.86 214.75 90 top
NOREF#635  -  []  184.47 176.66 90 top
